# Altium PCB 175-00033, rev1, Crate Slot Power Interface.PcbDoc
Units mil, origin at the board's own origin, x right, y up, seen from the top; angles counter-clockwise.
Board outline 5905.51 x 3937.01 mil, 4 copper layers (Top Layer (*.GTL), Internal Plane 1 (*.GP1), Internal Plane 2 (*.GP2), Bottom Layer (*GBL)); 16 components, 13 nets, 93 pads, 22 vias.
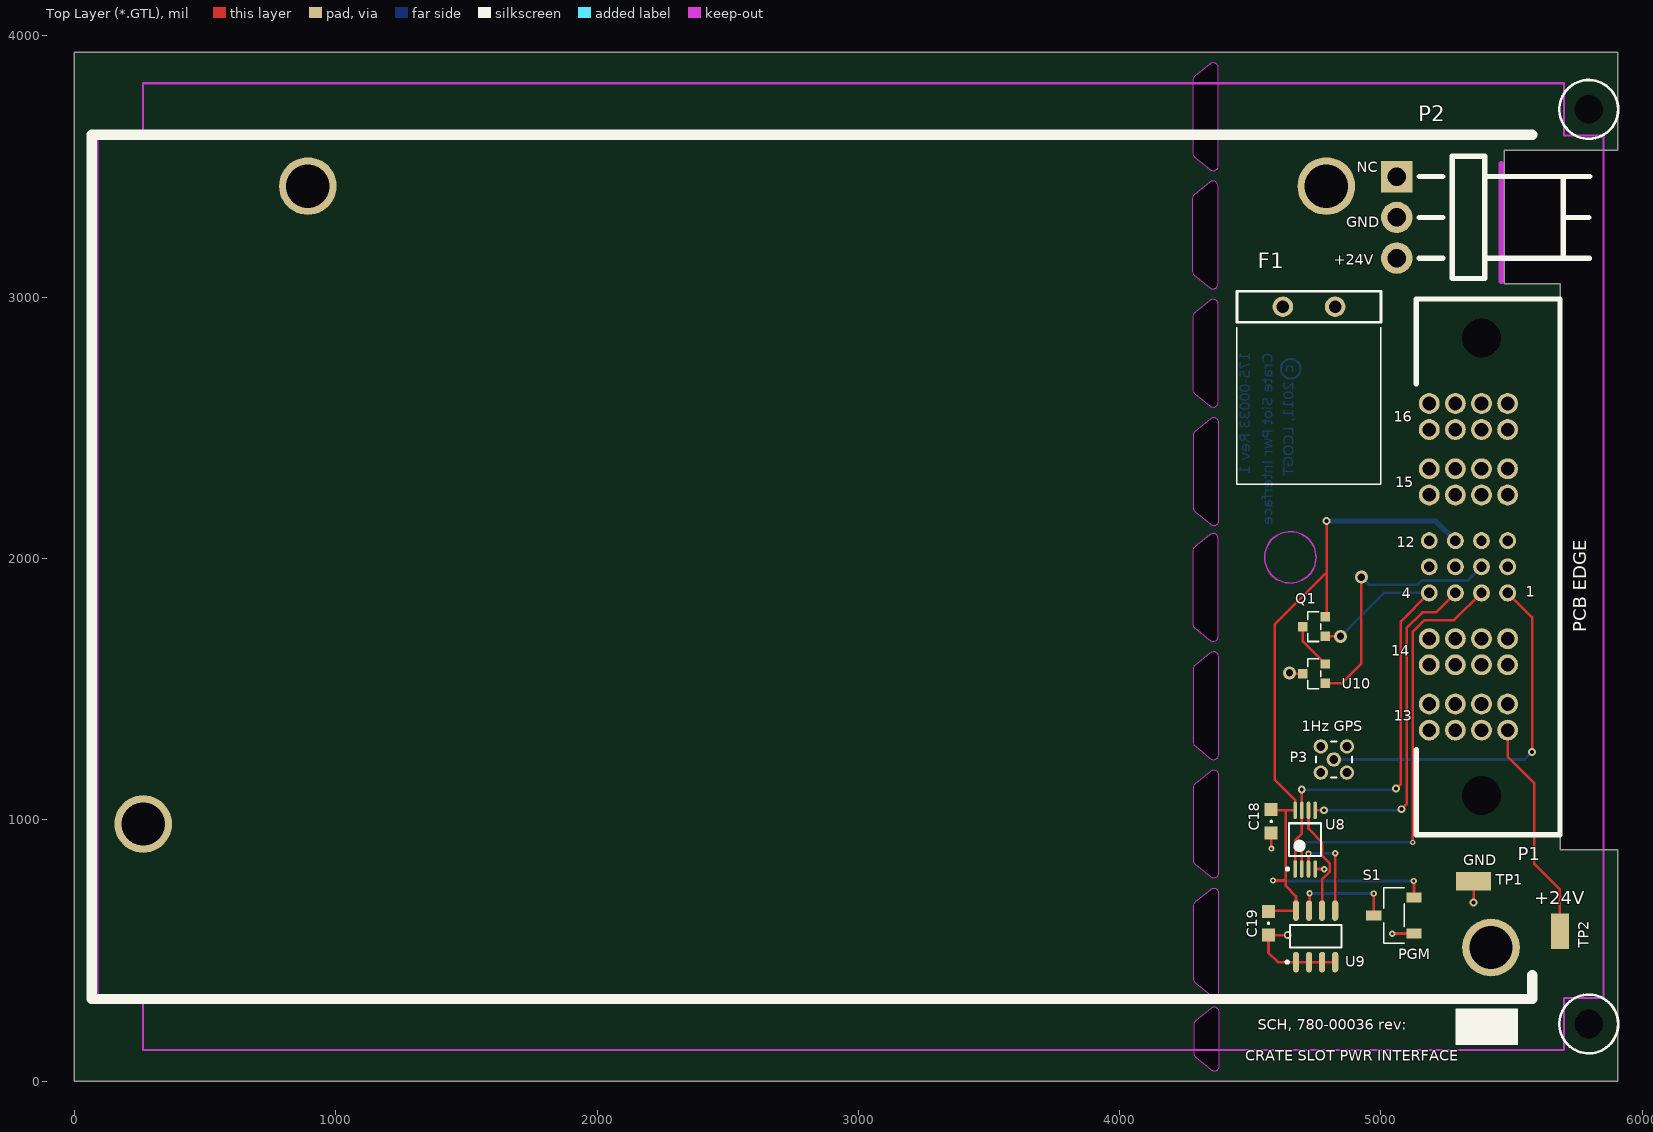
[diagram p0: Top Layer (*.GTL) view]
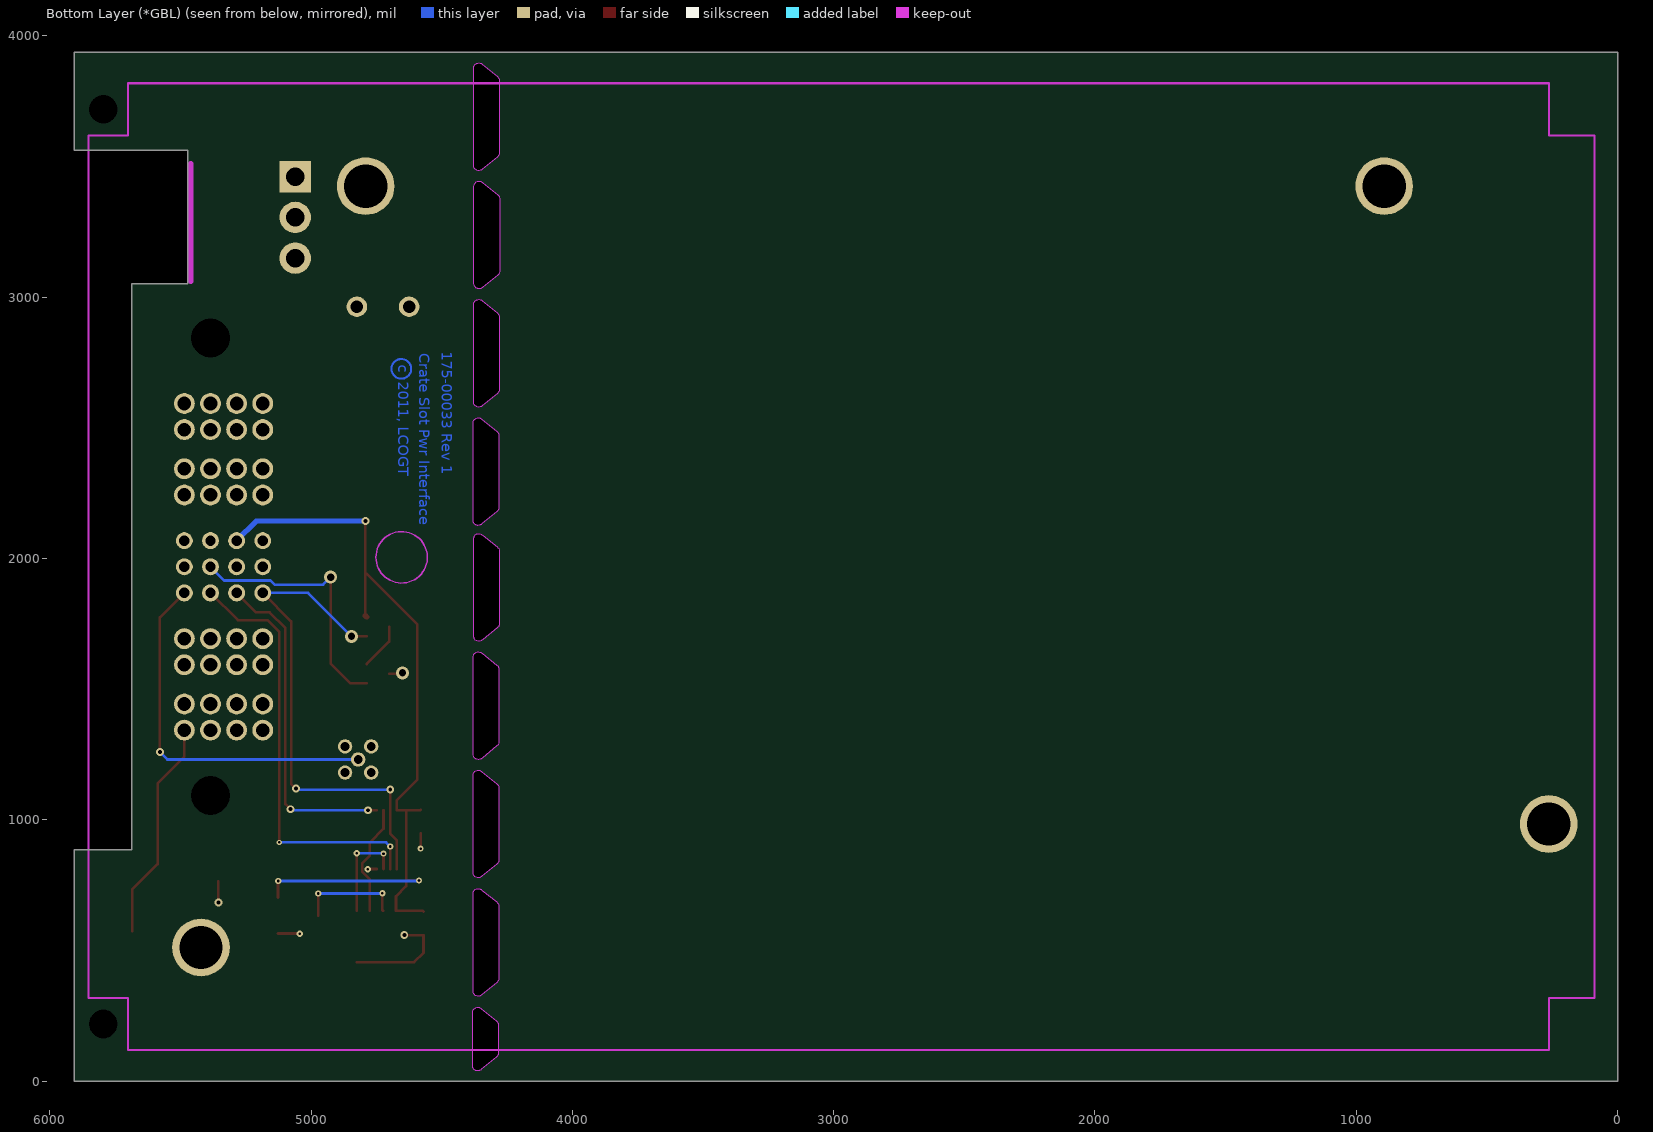
[diagram p1: Bottom Layer (*GBL) view, seen from below]
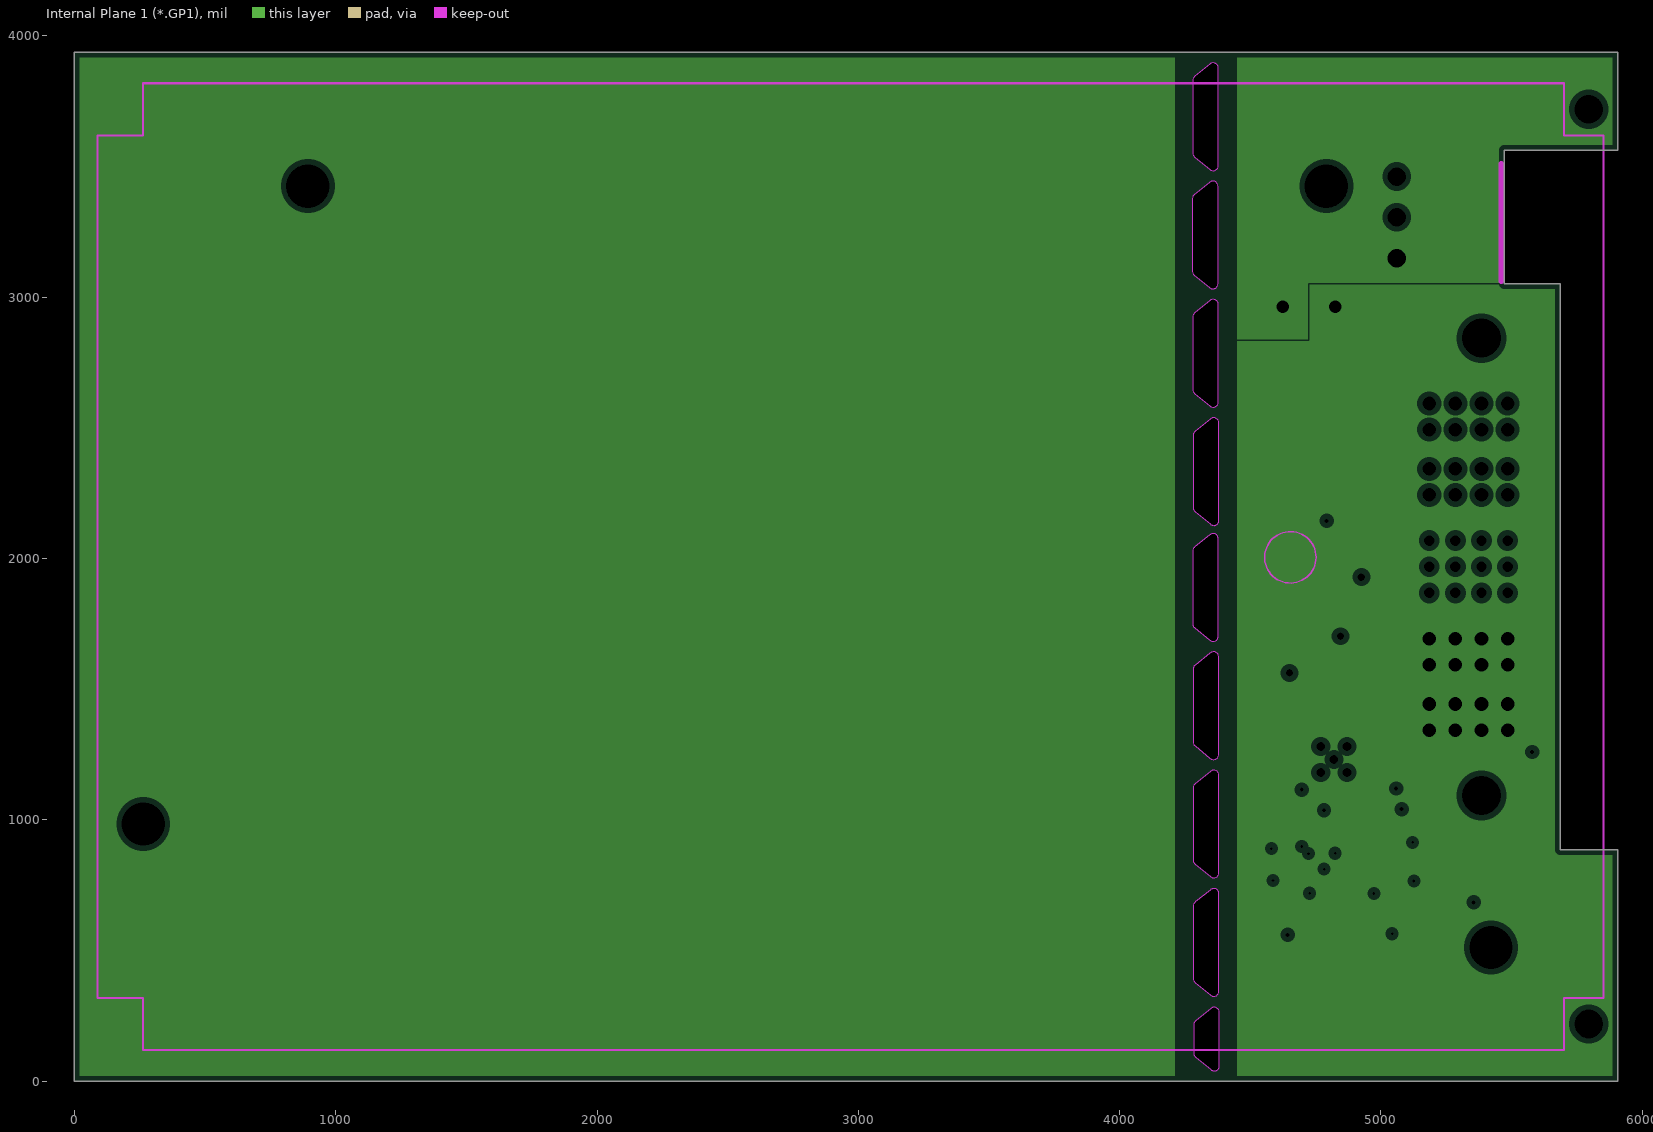
[diagram p2: Internal Plane 1 (*.GP1), clearances drawn from the general rule]
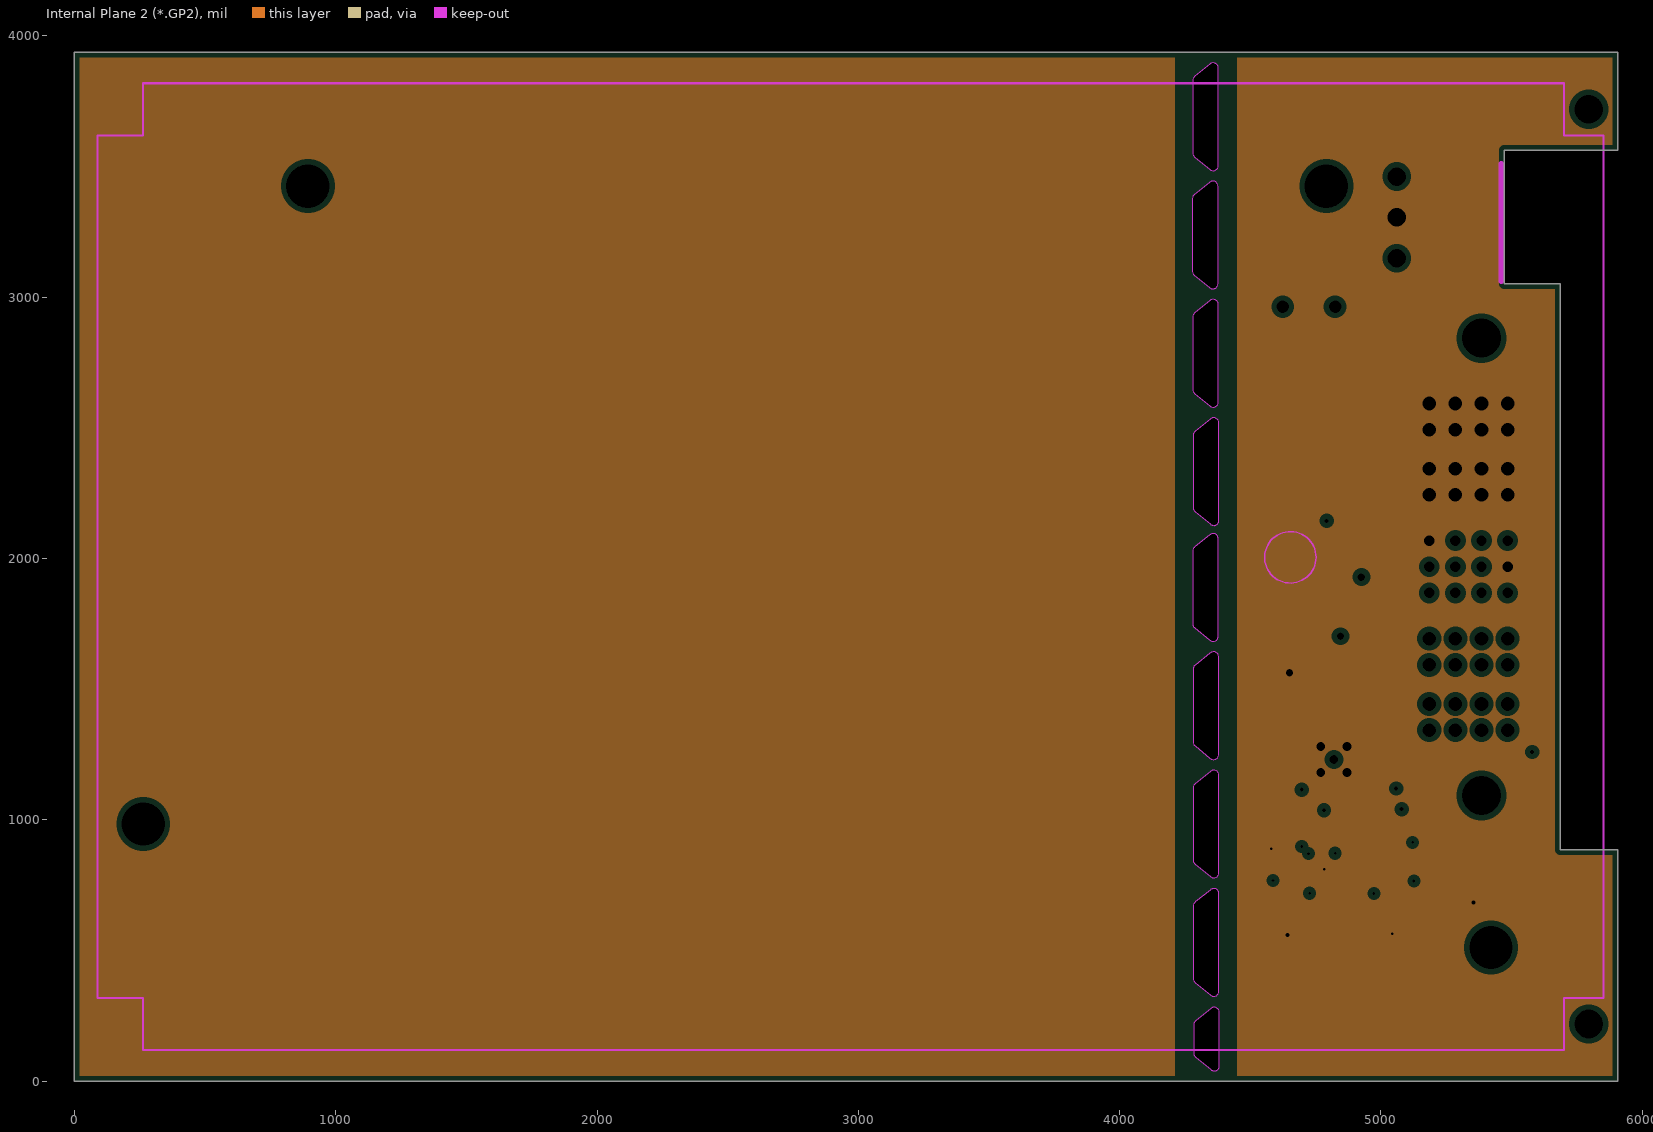
[diagram p3: Internal Plane 2 (*.GP2), clearances drawn from the general rule]

## Layer stack, top to bottom
Top Layer (*.GTL): signal copper 1.4
Dielectric: core 12.6, FR-4, Dk 4.8
Internal Plane 1 (*.GP1): plane copper 1.4, net (Multiple Nets)
Dielectric: prepreg 12.6, FR-4, Dk 4.8
Internal Plane 2 (*.GP2): plane copper 1.4, net GND
Dielectric: core 12.6, FR-4, Dk 4.8
Bottom Layer (*GBL): signal copper 1.4

## Board outline
0,0 0,3937.01 5905.51,3937.01 5905.51,3562.99 5472.44,3562.99 5472.44,3051.18 5685.04,3051.18 5685.04,885.83 5905.51,885.83 5905.51,0
cut-out: 4279.16,3553.17 ccw(c4298.82,3552.18) 4287.11,3536.36 4343.91,3490.08 ccw(c4357.87,3503.95) 4377.56,3503.95 4377.56,3876.99 ccw(c4357.87,3876.99) 4343.91,3890.86 4287.11,3845.34 ccw(c4298.82,3829.51) 4279.16,3828.53 4279.13,3828.53
cut-out: 4278.02,3100.88 ccw(c4297.68,3099.9) 4285.97,3084.08 4342.77,3037.8 ccw(c4356.73,3051.67) 4376.42,3051.67 4376.42,3424.7 ccw(c4356.73,3424.7) 4342.77,3438.58 4285.97,3393.06 ccw(c4297.68,3377.23) 4278.02,3376.25 4277.99,3376.25
cut-out: 4279.16,2648.13 ccw(c4298.82,2647.15) 4287.11,2631.32 4343.91,2585.04 ccw(c4357.87,2598.92) 4377.56,2598.92 4377.56,2971.95 ccw(c4357.87,2971.95) 4343.91,2985.83 4287.11,2940.3 ccw(c4298.82,2924.48) 4279.16,2923.49 4279.13,2923.49
cut-out: 4281.33,2195.37 ccw(c4300.99,2194.39) 4289.28,2178.57 4346.08,2132.28 ccw(c4360.04,2146.16) 4379.73,2146.16 4379.73,2519.19 ccw(c4360.04,2519.19) 4346.08,2533.07 4289.28,2487.54 ccw(c4300.99,2471.72) 4281.33,2470.74 4281.3,2470.74
cut-out: 4278.97,1752.08 ccw(c4298.63,1751.09) 4286.92,1735.27 4343.72,1688.99 ccw(c4357.68,1702.86) 4377.37,1702.86 4377.37,2075.9 ccw(c4357.68,2075.9) 4343.72,2089.77 4286.92,2044.25 ccw(c4298.63,2028.42) 4278.97,2027.44 4278.94,2027.44
cut-out: 4280.76,1299.7 ccw(c4300.42,1298.72) 4288.71,1282.9 4345.51,1236.61 ccw(c4359.47,1250.49) 4379.16,1250.49 4379.16,1623.52 ccw(c4359.47,1623.52) 4345.51,1637.4 4288.71,1591.88 ccw(c4300.42,1576.05) 4280.76,1575.07 4280.73,1575.07
cut-out: 4281.33,846.95 ccw(c4300.99,845.96) 4289.28,830.14 4346.08,783.86 ccw(c4360.04,797.74) 4379.73,797.74 4379.73,1170.77 ccw(c4360.04,1170.77) 4346.08,1184.65 4289.28,1139.12 ccw(c4300.99,1123.3) 4281.33,1122.31 4281.3,1122.31
cut-out: 4281.61,393.81 ccw(c4301.28,392.83) 4289.57,377 4346.37,330.72 ccw(c4360.33,344.6) 4380.02,344.6 4380.02,717.63 ccw(c4360.33,717.63) 4346.37,731.51 4289.57,685.98 ccw(c4301.28,670.16) 4281.61,669.17 4281.59,669.17
cut-out: 4283.28,108.1 ccw(c4302.94,107.11) 4291.23,91.29 4348.03,45.01 ccw(c4361.99,58.89) 4381.68,58.89 4381.68,263.44 ccw(c4361.99,263.44) 4348.03,277.32 4291.23,231.79 ccw(c4302.94,215.97) 4283.28,214.98

## Design rules (kind name [scope] priority, off if disabled: settings)
Clearance [All] p1: gap=5
HoleSize [All] p1: absolutevalues=TRUE maxlimit=500 minlimit=1 maxpercent=80.000 minpercent=20.000
HoleToHoleClearance [All] p1: gap=3 allowstackedmicrovias=TRUE
MinimumSolderMaskSliver [All] p1: minsoldermaskwidth=2
PlaneClearance [All] p1: clearance=20
PlaneConnect [All] p1: planeconnectstyle=Direct reliefexpansion=20 reliefentries=4 reliefconductorwidth=10 reliefairgap=10
PolygonConnect [All] p1: connectstyle=Relief reliefconductorwidth=10 reliefentries=4 polygonreliefangle="90 Angle"
RoomDefinition "780-00036, rev1, Sch, Crate Slot Power Interface" [InComponentClass('780-00036, rev1, Sch, Crate Slot Power Interface')] p1: confinementstyle=ConfineIn formatcopy=TRUE lockcomponents=FALSE outline 4433.69,393.89 5819.69,393.89 5819.69,3559.89 4433.69,3559.89
RoutingVias [All] p1: holewidth=10 width=20 viastyle="Through Hole" minholewidth=10 minwidth=20 maxholewidth=50 maxwidth=50
SilkToSilkClearance [All] p1: silktosilkclearance=2
SilkscreenOverComponentPads [All] p1: minsilkscreentomaskgap=2
SolderMaskExpansion [All] p1: expansion=4
Width [All] p1: maxlimit=100 minlimit=8 preferedwidth=10
21 further rules are at their usual default settings.

## Classes and differential pairs
component class "780-00036, rev1, Sch, Crate Slot Power Interface": +24V C18 C19 F1 P1 P2 P3 Q1 S1 TP1 TP2 U8 U9 U10

## Components (designator, comment, footprint, x,y, rotation, side; value= is the part's Value field where it differs from the comment)
C18 "Cap SMD" SMD_0805 4579.65,994.23 r270 top
C19 "Cap SMD" SMD_0805 4569.65,604.23 r270 top
F1 "RUEF400" "PolySwitch Radial 0.2" 4724.41,2963.71 r180 top
P1 "PETC-02-12-02--01-S-RA-SD" PETC-02-12-02-01-RA 5334.65,1968.5 r0 top locked
P2 "Header 3" "HDR 1X3 0.156\" - RT ANGLE" 5060.32,3461.61 r270 top
P3 "COAX MMCX" MMCX2.54-V5 4819.69,1231.1 r90 top
Q1 "FDV304P" SMD_SOT23_3 4744.09,1739.57 r90 top
S1 "CJS-1200TB" CAS-120B 5049.65,634.23 r90 top
TP1 "Test Point SMD" "SMD_TEST POINT" 5354.33,765.45 r180 top
TP2 "Test Point SMD" "SMD_TEST POINT" 5684.65,574.02 r90 top
U8 "SN74CBT3306PWLE" PW008_N 4709.65,924.23 r90 top
U9 "M24C32RMN1" SOP8_N 4749.65,554.23 r90 top
U10 "DS2411" SMD_SOT23_3 4744.09,1559.57 r90 top
? "Comment" "TARGET MECHANICAL 5" 6296,4300 r0 top
? "Comment" "TARGET MECHANICAL 5" -924,4316 r0 top
? "Comment" "TARGET MECHANICAL 5" -795,-878 r0 top

## Footprints (in the part's own frame and the unit in brackets; to place one, negate y for a bottom-side part, rotate by r counter-clockwise, add the part's x,y. Pads: shape width x height; smd on the part's side, far side on the other; paste and mask are expansions set on the pad)
CAS-120B [mm] "Copal Electronics CAS SMD Slide Switch"
  rect 1x1.5 smd: 1(-1.75,-1.95) 2(0,1.95) 3(1.75,-1.95)
  silkscreen extent -2.69,-1 2.69,1
"HDR 1X3 0.156\" - RT ANGLE" [mil] "Connector; Header; 3 Position, RT Angle"
  rect 120x120 hole 70: 1(0,0)
  round 120 hole 70: 2(156,0) 3(312,0)
  Keep-Out Layer lines w20: 400,400 -50,400
  silkscreen extent -78,85 390,739
MMCX2.54-V5 [mm] "Connector; RF Coaxial, MMCX, Thru-Hole; 5 Position; Vertical"
  round 1.4 hole 0.85: 1(0,0) 2(-1.27,-1.27) 3(1.27,-1.27) 4(1.27,1.27) 5(-1.27,1.27)
  silkscreen extent -1.75,-1.75 1.75,1.75
PETC-02-12-02-01-RA [mil] "Samtec Male Pins, PWR(4), Signal(12), Right Angle"
  round 59.06 hole 150 unplated: 0(50,-875) 0(50,875)
  round 65 hole 40: 1(150,-100) 2(50,-100) 3(-50,-100) 4(-150,-100) 5(150,0) 6(50,0) 7(-50,0) 8(-150,0) 9(150,100) 10(50,100) 11(-50,100) 12(-150,100)
  round 80 hole 52: 13(-150,-625) 13(-150,-525) 13(-50,-625) 13(-50,-525) 13(50,-625) 13(50,-525) 13(150,-625) 13(150,-525) 14(-150,-375) 14(-150,-275) 14(-50,-375) 14(-50,-275) 14(50,-375) 14(50,-275) 14(150,-375) 14(150,-275) 15(-150,275) 15(-150,375) 15(-50,275) 15(-50,375) 15(50,275) 15(50,375) 15(150,275) 15(150,375) 16(-150,525) 16(-150,625) 16(-50,525) 16(-50,625) 16(50,525) 16(50,625) 16(150,525) 16(150,625)
  silkscreen extent -200,-1025 350,1025
"PolySwitch Radial 0.2" [mm] "PolySwitch footprint"
  round 2 hole 1.2: 1(-2.54,0) 2(2.54,0)
  silkscreen extent -7,-1.5 7,1.5
PW008_N [mm] "SOP, 8-Leads, Body 3x4.4mm, Pitch 0.65mm, IPC Medium Density"
  oval 1.7x0.35 smd: 1(-2.85,0.975) 2(-2.85,0.325) 3(-2.85,-0.325) 4(-2.85,-0.975) 5(2.85,-0.975) 6(2.85,-0.325) 7(2.85,0.325) 8(2.85,0.975)
  silkscreen extent -2.97,-1.55 1.6,1.82, body extent -2.25,-1.55 2.25,1.55, height 3.1
SMD_0805 [mil]
  rect 50x50 smd: 1(-45,0) 2(45,0)
  silkscreen extent -1,-1 1,1
SMD_SOT23_3 [mil]
  rect 36x36 smd: 1(-37,-43) 2(37,-43) 3(0,43)
  silkscreen extent -57,-25 57,25
"SMD_TEST POINT" [mil] "Keystone 5015"
  rect 135x70 smd: 1(0,0)
SOP8_N [mm] "SOIC, 8-Leads, Body 4.9x3.9mm, Pitch 1.27mm, IPC Medium Density"
  oval 2x0.6 smd: 1(-2.5,1.905) 2(-2.5,0.635) 3(-2.5,-0.635) 4(-2.5,-1.905) 5(2.5,-1.905) 6(2.5,-0.635) 7(2.5,0.635) 8(2.5,1.905)
  silkscreen extent -2.62,-2.5 1.1,2.88, body extent -2,-2.5 2,2.5, height 1.75
"TARGET MECHANICAL 5" [mil]

## Part data
C18 C19: "Capacitor"
F1: library part "Fuse Thermal", "PolySwitch RUE Series"
P1: "SAMTEC, SIGNAL(12)+PWR(4)"
P2: library part "Header 3, 0.156 RT ANGLE", "Header, 3-Pin, 0.156, RT ANGLE"
P3: library part COAX-M, "RF Coaxial PCB Connector, MMCX; Thru-Hole, Vertical Mount Plug,  50 Ohm Impedance"
Q1: "P-MOSFET LOGIC LEVEL"
S1: library part SW_SPDT_DOUG
TP1 TP2: "SMD loop test point"
U8: "Dual FET Bus Switch"
U9: "32 Kbit Serial I²C Bus EEPROM"
U10: "Silicon Serial Number"

## Free pads (board coordinates)
  round 220.47 hole 166.14: 0(263.39,984.25) 0(893.31,3425.2) 0(4790.94,3425.2) 0(5420.87,511.81)
  round 50 hole 110 unplated: 2(5795.09,219) 2(5795.09,3719)

## Via types
v1: diameter 24, hole 10, Top Layer (*.GTL) to Bottom Layer (*GBL), 10 vias
v2: diameter 30, hole 15, Top Layer (*.GTL) to Bottom Layer (*GBL), 8 vias
v3: diameter 50, hole 28, Top Layer (*.GTL) to Bottom Layer (*GBL), 3 vias
v4: diameter 20, hole 10, Top Layer (*.GTL) to Bottom Layer (*GBL), 1 vias

## Nets (pads, with @x,y where several pads share a name; then routed paths per layer and width w, separated by ;. In a path a pad name is that pad's centre, name@x,y a point inside that pad or via, vN(x,y) a via of type N, cw(c..) or ccw(c..) an arc to the next point about the centre after c; other vN are vias at no path point)
+3.3V_BKPL: C18.1 C19.1 P1.11 Q1.2 S1.3 U8.8 U9.8 | length 3166.9
  Top Layer (*.GTL) w10: C19.1 4573.07,652.65 U9.8 4674.65,707.23 4635.65,746.23 4635.65,768.23 ; C18.1 4582.44,1036.43 4635.65,1036.43 ; v1(4586.65,768.23) 4635.65,768.23 ; Q1.2@4792,1781.47 4792,1941 ; v2(4792,2144) 4792,1941 ; v1(5125.65,766.23) 5126.42,765.45 S1.3 ; 4635.65,768.23 4635.65,1036.43 ; 4635.65,1036.43 U8.8 4671.26,1075.74 4594,1153 4594,1749 4786,1941 4792,1941
  Top Layer (*.GTL) w20: Q1.2 Q1.2@4792,1781.47
  Bottom Layer (*GBL) w10: v1(4586.65,768.23) 4588.65,766.23 v1(5125.65,766.23)
  Bottom Layer (*GBL) w20: v2(4792,2144) 5209.15,2144 P1.11
+24V: F1.1 P1.13 P1.14 TP2.1 | length 852.3
  Top Layer (*.GTL) w10: P1.13@5484.65,1343.5 5484.65,1242.35 5587,1140 5587,831 5684.65,733.35 TP2.1
+24V_FUSED: F1.2 P2.3
GND: C18.2 C19.2 P1.5 P1.12 P1.15 P1.16 P2.2 P3.2 P3.3 P3.4 P3.5 S1.1 TP1.1 U8.4 U9.1 U9.2 U9.3 U9.4 U10.3 | length 723.3
  Top Layer (*.GTL) w10: C18.2 4579.65,891.23 v1(4580.65,890.23) ; v2(4643,560) 4642.23,559.23 C19.2 4569.65,491.23 4605.07,455.8 U9.1 U9.2 U9.3 U9.4 ; v3(4650.09,1562.57) 4653.09,1559.57 U10.3 ; U8.4 4781.85,812.02 v1(4782.65,811.23) ; v1(5042.65,564.23) 5043.75,565.33 S1.1 ; v2(5354.33,684.37) TP1.1
GPS_DATA: P1.1 P3.1 | length 1418
  Top Layer (*.GTL) w10: P1.1 5578.35,1774.8 v2(5578.35,1259.84)
  Bottom Layer (*GBL) w10: P3.1 5549.61,1231.1 v2(5578.35,1259.84)
I2C_SCL: U8.6 U9.6 | length 430.3
  Top Layer (*.GTL) w10: U8.6 4722.44,966.43 4774.65,914.23 4774.65,863.23 4804.65,833.23 4804.65,802.11 4774.65,772.11 U9.6
I2C_SDA: U8.3 U9.5 | length 381.3
  Top Layer (*.GTL) w10: U8.3 v1(4722.44,871.02) ; U9.5 v1(4824.65,872.23)
  Bottom Layer (*GBL) w10: v1(4722.44,871.02) 4723.65,872.23 v1(4824.65,872.23)
NetP1_2: P1.2 U8.2 | length 1647.4
  Top Layer (*.GTL) w10: U8.2 v1(4696.85,898.02) ; v4(5121.09,913.91) 5121.09,1719 5166.09,1764 5280.14,1764 P1.2
  Bottom Layer (*GBL) w10: v1(4696.85,898.02) 4712.74,913.91 v4(5121.09,913.91)
NetP1_3: P1.3 U8.5 | length 1275.2
  Top Layer (*.GTL) w10: U8.5@4748.6,1037 v2(4782,1037) ; v2(5079,1041) 5098.09,1060.09 5098.09,1734 5158.09,1794 5210.14,1794 P1.3
  Bottom Layer (*GBL) w10: v2(4782,1037) 5075,1037 v2(5079,1041)
NetQ1_3: Q1.3 U10.2 | length 178.6
  Top Layer (*.GTL) w10: Q1.3 4701.09,1682.57 U10.2
NetS1_2: S1.2 U9.7 | length 397.9
  Top Layer (*.GTL) w10: U9.7 4726.65,654.65 v1(4726.65,719.23) ; v1(4972.65,718.23) 4972.87,718 S1.2
  Bottom Layer (*GBL) w10: v1(4726.65,719.23) 4727.65,718.23 v1(4972.65,718.23)
SILICON_SN: P1.6 U10.1 | length 999.5
  Top Layer (*.GTL) w10: U10.1 4848.48,1522.57 4925,1599.09 v3(4925,1929)
  Bottom Layer (*GBL) w10: v3(4925,1929) 4954,1900 5139,1900 5155,1916 5332.14,1916 P1.6
~CS_SLOT: P1.4 Q1.1 U8.1 U8.7 | length 1944.6
  Top Layer (*.GTL) w10: U8.1 4671.26,921.84 4696.85,947.43 U8.7 v2(4696.85,1116) ; Q1.1 v3(4845.09,1702.57) ; v2(5058,1120) 5076.09,1138.09 5076.09,1759.95 P1.4
  Bottom Layer (*GBL) w10: v2(4696.85,1116) 5054,1116 v2(5058,1120) ; v3(4845.09,1702.57) 5011.03,1868.5 P1.4
pads on no net: P1.0 P1.7 P1.8 P1.9 P1.10 P2.1
copper on no net: | length 236.5
  Bottom Layer (*GBL) w8: 4692,2726 ccw(c4654.36,2726) 4692,2726

## Polygon pours and split planes (outlines as drawn)
+24V_FUSED on Internal Plane 1 (*.GP1) (split plane): 5885.41,3583.09 5472.44,3583.09 5468.52,3582.7 5464.75,3581.56 5461.28,3579.7 5458.23,3577.2 5455.73,3574.16 5453.87,3570.68 5452.73,3566.91 5452.34,3562.99 5452.34,3053.73 4724.41,3053.73 4723.43,3053.54 4722.61,3052.98 4722.05,3052.16 4721.86,3051.18 4721.86,2837.19 4448.82,2837.19 4448.82,3916.91 5885.41,3916.91
+24V on Internal Plane 1 (*.GP1) (split plane): 5452.73,3047.26 5453.87,3043.49 5455.73,3040.02 5458.23,3036.97 5461.28,3034.47 5464.75,3032.61 5468.52,3031.47 5472.44,3031.08 5664.94,3031.08 5664.94,885.83 5665.33,881.91 5666.47,878.14 5668.33,874.66 5670.83,871.62 5673.87,869.12 5677.35,867.26 5681.12,866.12 5685.04,865.73 5885.41,865.73 5885.41,20.1 4448.82,20.1 4448.82,2829.55 4449.79,2829.74 4450.62,2830.29 4451.17,2831.12 4451.37,2832.1 4724.41,2832.1 4725.38,2832.29 4726.21,2832.84 4726.76,2833.67 4726.96,2834.65 4726.96,3048.63 5452.6,3048.63
+24V on Internal Plane 1 (*.GP1) (split plane): 4212.6,20.1 20.1,20.1 20.1,3916.91 4212.6,3916.91
GND on Internal Plane 2 (*.GP2) (split plane): 5885.41,3583.09 5472.44,3583.09 5468.52,3582.7 5464.75,3581.56 5461.28,3579.7 5458.23,3577.2 5455.73,3574.16 5453.87,3570.68 5452.73,3566.91 5452.34,3562.99 5452.34,3051.18 5452.73,3047.26 5453.87,3043.49 5455.73,3040.02 5458.23,3036.97 5461.28,3034.47 5464.75,3032.61 5468.52,3031.47 5472.44,3031.08 5664.94,3031.08 5664.94,885.83 5665.33,881.91 5666.47,878.14 5668.33,874.66 5670.83,871.62 5673.87,869.12 5677.35,867.26 5681.12,866.12 5685.04,865.73 5885.41,865.73 5885.41,20.1 4448.82,20.1 4448.82,3916.91 5885.41,3916.91
GND on Internal Plane 2 (*.GP2) (split plane): 4212.6,20.1 20.1,20.1 20.1,3916.91 4212.6,3916.91

## Keep-outs
Keep-Out Layer:
  circle w5: c4653.14,2004.68 r98.44
  lines w8: 88.39,319 88.39,3619 263.39,3619 263.39,3819 5700.69,3819 5700.69,3619 5850.69,3619 5850.69,319 5700.69,319 5700.69,119 263.39,119 263.39,319 88.39,319

## Other copper
Top Layer (*.GTL):
  text "*.GTL - TOP LAYER GERBER DATA" at 1644,-1316 h80
Bottom Layer (*GBL):
  text "175-00033 Rev 1" at 4499,2791 h40 r90
  text "Crate Slot Pwr Interface" at 4585,2786 h40 r90
  text "c  2011, LCOGT" at 4667,2741 h40 r90
  text "*.GBL - BOTTOM LAYER GERBER DATA" at 1644,-1316 h80
Internal Plane 1 (*.GP1) (plane layer: these items are gaps in the copper):
  pour cut-out: 4212.6,3937.01 4212.6,0 4448.82,0 4448.82,3937.01
  lines w5: 4330.71,2832.1 4448.82,2832.1 ; 4448.82,2834.65 4724.41,2834.65 4724.41,3051.18 5472.44,3051.18
  text "*.GP1 - INTERNAL PLANE LAYER 1 GERBER DATA" at 1644,-1316 h80
Internal Plane 2 (*.GP2) (plane layer: these items are gaps in the copper):
  pour cut-out: 4212.6,3937.01 4212.6,0 4448.82,0 4448.82,3937.01
  text "*.GP2 - INTERNAL PLANE LAYER 2 GERBER DATA" at 1644,-1316 h80

## Silkscreen, mask and mechanical layers (free items; w line width, h text height)
Top Overlay:
  circle w10: c5795.09,219 r112.5
  circle w10: c5795.09,3719 r112.5
  rectangle: 5284.65,138.26 5523.46,277.63
  lines w5: 4448.82,2884.29 4448.82,2283.46 5000,2283.46 5000,2884.29
  lines w39.37: 5578.35,406.59 5578.35,314.96 66.54,314.96 66.54,3622.05 5164.29,3622.05 5578.35,3622.05
  text "NC" at 4908,3478 h40
  text "GND" at 4867,3268 h40
  text "+24V" at 4819,3124 h40
  text "1Hz GPS" at 4697.09,1338.58 h40
  text "GND" at 5314.96,826.77 h40
  text "+24V" at 5587,677.53 h50
  text "PGM" at 5065.55,467.14 h40
  text "SCH, 780-00036 rev:" at 4527.56,196.85 h40
  text "CRATE SLOT PWR INTERFACE" at 4479.66,78.74 h40
  text "*.GTO - TOP OVERLAY GERBER DATA" at 1644,-1316 h80
Top Paste:
  text "*.GTP - TOP-SIDE SOLDER PASTE MASK" at 1643.99,-1315.99 h80
Top Solder:
  text "*.GTS - TOP SOLDER MASK GERBER DATA" at 1644,-1316 h80
Bottom Solder:
  rectangle: 4431,1817 4706,2845
  text "*.GBS - BOTTOM SOLDER MASK GERBER DATA" at 1644,-1316 h80
Mechanical 1:
  the board outline again, w39.37
Mechanical 2:
  lines w10: -10224,-9889 -10224,6111 10776,6111 10776,-9889 -10224,-9889 ; 6721,-9783 ccw(c6771,-9783) 6771,-9833 7101,-9833 ccw(c7101,-9793) 7141,-9793 7141,-9623 ccw(c7101,-9623) 7101,-9583 6721,-9583 6721,-9783 ; 6721,-9493 ccw(c6771,-9493) 6771,-9543 10671,-9543 ccw(c10671,-9493) 10721,-9493 10721,-9303 ccw(c10671,-9303) 10671,-9253 6721,-9253 6721,-9493 ; 6721,-9163 ccw(c6771,-9163) 6771,-9213 8651,-9213 ccw(c8651,-9163) 8701,-9163 8701,-9013 ccw(c8651,-9013) 8651,-8963 6721,-8963 6721,-9163 ; 6721,-8883 ccw(c6761,-8883) 6761,-8923 7571,-8923 ccw(c7571,-8873) 7621,-8873 7621,-8723 ccw(c7571,-8723) 7571,-8673 6721,-8673 6721,-8883 ; 7181,-9793 ccw(c7221,-9793) 7221,-9833 9181,-9833 ccw(c9181,-9793) 9221,-9793 9221,-9623 ccw(c9181,-9623) 9181,-9583 7181,-9583 7181,-9793 ; 7661,-8873 ccw(c7711,-8873) 7711,-8923 8651,-8923 ccw(c8651,-8873) 8701,-8873 8701,-8723 ccw(c8651,-8723) 8651,-8673 7661,-8673 7661,-8873 ; 8741,-9163 ccw(c8791,-9163) 8791,-9213 10671,-9213 ccw(c10671,-9163) 10721,-9163 10721,-9013 ccw(c10671,-9013) 10671,-8963 8741,-8963 8741,-9163 ; 8741,-8873 ccw(c8791,-8873) 8791,-8923 9731,-8923 ccw(c9731,-8873) 9781,-8873 9781,-8723 ccw(c9731,-8723) 9731,-8673 8741,-8673 8741,-8873 ; 9261,-9783 ccw(c9311,-9783) 9311,-9833 9641,-9833 ccw(c9641,-9793) 9681,-9793 9681,-9623 ccw(c9641,-9623) 9641,-9583 9261,-9583 9261,-9783 ; 9721,-9793 ccw(c9761,-9793) 9761,-9833 10671,-9833 ccw(c10671,-9783) 10721,-9783 10721,-9633 ccw(c10671,-9633) 10671,-9583 9721,-9583 9721,-9793 ; 9821,-8873 ccw(c9871,-8873) 9871,-8923 10671,-8923 ccw(c10671,-8873) 10721,-8873 10721,-8723 ccw(c10671,-8723) 10671,-8673 9821,-8673 9821,-8873
  lines w14: -8840,-5824.33 -4184,-5824.33 ; -8840,-5564.33 -4184,-5564.33 ; -8900,-7934 ccw(c-8816,-7934) -8816,-8018 -4208,-8018 ccw(c-4208,-7934) -4124,-7934 -4124,-4822 ccw(c-4208,-4822) -4208,-4738 -8816,-4738 ccw(c-8816,-4822) -8900,-4822 -8900,-7934
  lines w20: -10203.94,-9243.12 cw(c-10154,-9318) -10154,-9228 ; -10154,-9268 ccw(c-10154,-9318) -10204,-9318 -10204,-9808 ccw(c-10154,-9808) -10154,-9858 -6954,-9858 ccw(c-6954,-9808) -6904,-9808 -6904,-9468 ccw(c-6954,-9468) -6954,-9418 -9594,-9418 ; -6879.12,-9857.94 ccw(c-6954,-9808) -6864,-9808 -6864,-9468 ; 6677.17,-9872.98 cw(c6771,-9783) 6641,-9783 6641,-8113 cw(c6771,-8113) 6771,-7983 10671,-7983 cw(c10671,-8113) 10759.66,-8017.92 ; -2694,-9709 ccw(c-2564,-9709) -2564,-9839 2176,-9839 ccw(c2176,-9709) 2306,-9709 2306,-8119 ccw(c2176,-8119) 2176,-7989 -2564,-7989 ccw(c-2564,-8119) -2694,-8119 -2694,-9709 ; 6681,-9783 ccw(c6771,-9783) 6771,-9873 10671,-9873 ccw(c10671,-9783) 10761,-9783 10761,-8113 ccw(c10671,-8113) 10671,-8023 6771,-8023 ccw(c6771,-8113) 6681,-8113 6681,-9783
  lines w24: -144,-9679 6,-9679 ; -144,-9429 6,-9429 ; -144,-9179 6,-9179 ; -144,-8929 6,-8929 ; -144,-8679 6,-8679
  lines w30: -10724,-10389 -10724,6611 11276,6611 11276,-10389 -10724,-10389
  lines w50: 6866,-8524 8516,-8524 ; 6866,-8144 8516,-8144 ; 8516,-8524 8516,-8144 ; 8516,-8524 6856,-8524 6856,-8144 8516,-8144
  text "NOTES (UNLESS OTHERWISE SPECIFIED):" at -9904,5587 h90
  text "GENERAL" at -9804,5387 h90
  text "1)" at -9704,5186.95 h75
  text "PCB IS 4-LAYER, .062\" THICK." at -9504,5186.97 h75
  text "2)" at -9704,5036.95 h75
  text "CONSTRUCTION IS SOLDER-MASK-OVER-BARE-COPPER (SMOBC)." at -9504,5036.95 h75
  text "3)" at -9704,4886.95 h75
  text "ACCEPTABILITY SHALL BE BASED ON IPC-A-600, CLASS 2." at -9504,4886.95 h75
  text "4)" at -9704,4736.95 h75
  text "THE FOLLOWING GERBER RS274X PHOTO TOOL FILES SHALL BE USED TO DEFINE ALL CIRCUIT FEATURES:" at -9504,4736.95 h75
  text "*.GTL - TOP LAYER GERBER DATA" at -9230,4526 h80
  text "*.GP1 - INTERNAL PLANE LAYER 1 GERBER DATA" at -9230,3911.34 h80
  text "*.GP2 - INTERNAL PLANE LAYER 2 GERBER DATA" at -9230,3757.67 h80
  text "*.GBL - BOTTOM LAYER GERBER DATA" at -9230,3143 h80
  text "*.GTO - TOP OVERLAY GERBER DATA" at -9230,2989.34 h80
  text "*.GTS - TOP SOLDER MASK GERBER DATA" at -9230,2835.67 h80
  text "*.GTP - TOP-SIDE SOLDER PASTE MASK" at -9230.01,2682 h80
  text "*.GBS - BOTTOM SOLDER MASK GERBER DATA" at -9230,2374.67 h80
  text "5)" at -9801,1505.23 h75
  text "THE PHOTO TOOL SHALL NOT BE COMPENSATED WITHOUT PRIOR ENGINEERING APPROVAL." at -9601,1505.23 h75
  text "PCB DESIGNER: RICH LOBDILL   PH (805) 880-1621  FAX (805) 961-1792." at -9601,1355.28 h75
  text "FABRICATION TOLERANCES" at -9746,1029 h90
  text "6)" at -9646,828.95 h75
  text "END PRODUCT CONDUCTOR WIDTHS AND PAD DIAMETERS SHALL NOT VARY MORE THAN" at -9446,828.95 h75
  text "0.002\" FROM THE 1:1 DIMENSIONS OF THE MASTER ARTWORK." at -9446,679 h75
  text "7)" at -9646,528.95 h75
  text "THE CONDUCTIVE PATTERN SHALL BE POSITIONED SO THAT THE LOCATION OF ANY PAD OR" at -9446,528.95 h75
  text "LAND SHALL BE WITHIN 0.005\" DIAMETER TO THE TRUE POSITION OF THE HOLE IT CIRCUMSCRIBES." at -9446,379 h75
  text "8)" at -9646,228.95 h75
  text "ALL DRILL HOLE SIZES AND TOLERANCES APPLY AFTER PLATING." at -9446,228.95 h75
  text "9)" at -9646,78.95 h75
  text "THE MINIMUM ANNULAR RING SHALL BE 0.005\"." at -9446,78.95 h75
  text "10)" at -9701,-71.05 h75
  text "BOW AND TWIST SHALL NOT EXCEED 0.010\" PER INCH." at -9446,-71.05 h75
  text "11)" at -9691,-221.05 h75
  text "FOR PCB ROUTING DIMENSIONS: .XXX = +/-.005\"  .XX = +/-.020\"" at -9446,-221.05 h75
  text "MATERIAL" at -9746,-421 h90
  text "12)" at -9701,-621.05 h75
  text "BASE MATERIAL IS FR4 EPOXY FIBERGLASS" at -9439,-627 h75
  text "SEE STACK-UP LEGEND FOR COPPER CLADDING CALL OUTS" at -9439,-767 h75
  text "13)" at -9701,-771.05 h75
  text "PLATING" at -9746,-971 h90
  text "14)" at -9701,-1166.05 h75
  text "ALL HOLES AND CONDUCTIVE SURFACES SHALL BE PLATED WITH A MINIMUM OF 0.001\" COPPER." at -9446,-1166.05 h75
  text "15)" at -9701,-1316.05 h75
  text "AFTER SOLDERMASK, ALL EXPOSED HOLES AND CONDUCTIVE SURFACES SHALL BE COATED" at -9446,-1316.05 h75
  text "WITH A GOLD IMMERSION PLATING TO PRESERVE SOLDERABILITY." at -9439,-1467 h75
  text "COATINGS" at -9746,-1666 h90
  text "16)" at -9696,-1861.05 h75
  text "THE SOLDERMASK SHALL BE BLACK LIQUID PHOTO-IMAGEABLE PER IPC-SM-840, TYPE-B, CLASS 2." at -9446,-1861.05 h75
  text "17)" at -9701,-2011.05 h75
  text "THE SOLDERMASK REGISTRATION ALLOWANCE IS 0.003\".  THERE SHALL BE NO SOLDERMASK ON" at -9446,-2011.05 h75
  text "ANY SOLDER PAD OR LAND." at -9446,-2161.05 h75
  text "MARKING" at -9746,-2361 h90
  text "18)" at -9701,-2556.05 h75
  text "THE LEGEND SHALL BE SCREEN-PRINTED USING PERMANENT YELLOW EPOXY INK." at -9446,-2556.05 h75
  text "19)" at -9701,-2706.05 h75
  text "THE SCREEN PRINTING REGISTRATION ALLOWANCE IS 0.007\".  THERE SHALL BE NO INK ON ANY" at -9446,-2706.05 h75
  text "SOLDER PAD OR LAND." at -9446,-2856 h75
  text "20)" at -9711,-3006.05 h75
  text "THE VENDOR CODE AND UL FLAMMABILITY RATING MAY BE ETCHED IN THE FOIL OR MARKED IN" at -9446,-3006.05 h75
  text "PERMANENT EPOXY INK (VENDOR'S OPTION)." at -9446,-3156 h75
  text "ELECTRICAL TESTING" at -9746,-3356 h90
  text "21)" at -9701,-3551.05 h75
  text "ALL BOARDS SHALL BE ELECTRICALLY TESTED TO THE SUPPLIED IPC-D-356A NET LIST" at -9446,-3551.05 h75
  text "FOR CONTINUITY, OPENS AND SHORTS." at -9446,-3701 h75
  text "Layer Stack Up Detail for: 175-00033, rev1, Crate Slot Power Interface.PcbDoc" at -8840,-5192.17 h60
  text "Layer" at -8840,-5661.33 h60
  text "COPPER THICKNESS" at -6577,-5751 h100
  text "Name" at -8840,-5781.33 h60
  text "Top Layer (*.GTL)" at -8840,-6079.67 h84
  text "1/2 oz,  1 oz Finished" at -6504,-6097 h100
  text "2 oz" at -6456,-6563 h100
  text "Internal Plane 1 (*.GP1)" at -8840,-6576.33 h84
  text "2 oz" at -6472,-7037 h100
  text "Internal Plane 2 (*.GP2)" at -8840,-7073 h84
  text "1/2 oz,  1 oz Finished" at -6488,-7512 h100
  text "Bottom Layer (*GBL)" at -8840,-7569.67 h84
  text "Las Cumbres Observatory, Inc." at 8686,-8164 h90
  text "Las Cumbres Observatory" at 6916,-8284 h150
  text "PRIMARY PCB SPECIFICATIONS" at -2247,-8299 h200
  text "6740 Cortona Dr." at 9126,-8318 h90
  text "Global Telescope Network" at 7076,-8444 h125
  text "Goleta, CA 93117" at 9076,-8468 h90
  text "(REFER TO COMPLETE SPEC LISTING AT LEFT FOR FURTHER DETAILS)" at -2594,-8504 h100
  text "www.lcogt.net" at 9216,-8614 h90
  text "DATE" at 6741,-8724.8 h32
  text "DESIGNED" at 7681,-8724.8 h32
  text "DRAWN" at 8761,-8724.8 h32
  text "SCALE" at 9841,-8724.8 h32
  text "NUMBER OF LAYERS" at -2494,-8754 h150
  text "4" at 1056,-8754.02 h150
  text "Rich Lobdill" at 9066,-8824 h55
  text "Rich Lobdill" at 7941,-8829 h55
  text "1 : 1" at 10126,-8843 h90
  text "9/1/2011" at 6771,-8850 h90
  text "FINISHED THICKNESS" at -2494,-9004 h150
  text ".062\"" at 881,-9004 h150
  text "CHECKED/DATE" at 6741,-9014.8 h32
  text "APPROVED/DATE" at 8761,-9014.8 h32
  text "BASE MATERIAL" at -2494,-9254 h150
  text "FR4" at 806,-9254 h150
  text "TITLE" at 6741,-9304.8 h32
  text "175-00033, Crate Slot Power Interface" at 6961,-9449 h100
  text "GOLD IMMERSION" at 312,-9471 h150
  text "PLATING TYPE" at -2494,-9504 h150
  text "THIS DRAWING EMBODIES A PROPRIETARY DESIGN OWNED BY LAS CUMBRES" at -10114,-9528 h60
  text "OBSERVATORY.  IT IS SUBMITTED FOR A SPECIFIC PURPOSE UNDER A CON-" at -10114,-9628 h60
  text "SIZE" at 6741,-9634.8 h32
  text "DOC NO." at 7201,-9634.8 h32
  text "REV" at 9281,-9634.8 h32
  text "SHEET" at 9741,-9634.8 h32
  text "FIDENTIAL RELATIONSHIP, AND EXCEPT FOR PURPOSES EXPRESSLY GRANTED" at -10114,-9723 h60
  text "OF" at 10171,-9738 h60
  text "SOLDER MASK COLOR" at -2494,-9754 h150
  text "BLACK" at 931,-9754 h150
  text "1" at 10001,-9758 h100
  text "X" at 10401,-9758 h100
  text "1" at 9426,-9771 h130
  text "-" at 7756,-9773 h130
  text "GPT" at 8475.72,-9787.8 h130
  text "C" at 6876,-9789 h100
  text "IN WRITING, ALL RIGHTS ARE RESERVED BY LAS CUMBRES OBSERVATORY." at -10114,-9813 h60
Mechanical 3:
  lines w5: 4330.71,0 5905.51,0
Mechanical 5:
  text "175-00033, Rev 1, Crate Slot Power Interface" at 1665.03,-885.42 h80
  text "LAS CUMBRES OBSERVATORY     9/1/2011" at 1665.03,-1035.43 h80
Drill Drawing:
  lines w10: -10224,-9889 -10224,6111 10776,6111 10776,-9889 -10224,-9889 ; 6721,-9783 ccw(c6771,-9783) 6771,-9833 7101,-9833 ccw(c7101,-9793) 7141,-9793 7141,-9623 ccw(c7101,-9623) 7101,-9583 6721,-9583 6721,-9783 ; 6721,-9493 ccw(c6771,-9493) 6771,-9543 10671,-9543 ccw(c10671,-9493) 10721,-9493 10721,-9303 ccw(c10671,-9303) 10671,-9253 6721,-9253 6721,-9493 ; 6721,-9173 ccw(c6761,-9173) 6761,-9213 8181,-9213 ccw(c8181,-9163) 8231,-9163 8231,-9013 ccw(c8181,-9013) 8181,-8963 6721,-8963 6721,-9173 ; 7181,-9793 ccw(c7221,-9793) 7221,-9833 9181,-9833 ccw(c9181,-9793) 9221,-9793 9221,-9623 ccw(c9181,-9623) 9181,-9583 7181,-9583 7181,-9793 ; 8271,-9163 ccw(c8321,-9163) 8321,-9213 9731,-9213 ccw(c9731,-9163) 9781,-9163 9781,-9013 ccw(c9731,-9013) 9731,-8963 8271,-8963 8271,-9163 ; 9261,-9783 ccw(c9311,-9783) 9311,-9833 9641,-9833 ccw(c9641,-9793) 9681,-9793 9681,-9623 ccw(c9641,-9623) 9641,-9583 9261,-9583 9261,-9783 ; 9721,-9793 ccw(c9761,-9793) 9761,-9833 10671,-9833 ccw(c10671,-9783) 10721,-9783 10721,-9633 ccw(c10671,-9633) 10671,-9583 9721,-9583 9721,-9793 ; 9821,-9163 ccw(c9871,-9163) 9871,-9213 10671,-9213 ccw(c10671,-9163) 10721,-9163 10721,-9013 ccw(c10671,-9013) 10671,-8963 9821,-8963 9821,-9163
  lines w20: -10198.94,-9258.12 cw(c-10149,-9333) -10149,-9243 ; -10149,-9283 ccw(c-10149,-9333) -10199,-9333 -10199,-9823 ccw(c-10149,-9823) -10149,-9873 -6949,-9873 ccw(c-6949,-9823) -6899,-9823 -6899,-9483 ccw(c-6949,-9483) -6949,-9433 -9589,-9433 ; -6874.12,-9872.94 ccw(c-6949,-9823) -6859,-9823 -6859,-9483 ; 6675.92,-9871.66 cw(c6771,-9783) 6641,-9783 6641,-8963 cw(c6721,-8963) 6721,-8883 10671,-8883 cw(c10671,-9013) 10759.66,-8917.92 ; 6681,-9783 ccw(c6771,-9783) 6771,-9873 10671,-9873 ccw(c10671,-9783) 10761,-9783 10761,-9013 ccw(c10671,-9013) 10671,-8923 6721,-8923 ccw(c6721,-8963) 6681,-8963 6681,-9783
  lines w30: -10724,-10389 -10724,6611 11276,6611 11276,-10389 -10724,-10389
  text ".Legend" at 250,-5772 h100
  text "DESIGNED" at 6741,-9014.8 h32
  text "DRAWN" at 8291,-9014.8 h32
  text "SCALE" at 9841,-9014.8 h32
  text "Rich Lobdill" at 7227,-9111 h55
  text "Rich Lobdill" at 8788,-9113 h55
  text "1 : 1" at 10126,-9133 h90
  text "TITLE" at 6741,-9304.8 h32
  text "175-00033, Crate Slot Power Interface" at 6958,-9449 h100
  text "THIS DRAWING EMBODIES A PROPRIETARY DESIGN OWNED BY LAS CUMBRES" at -10109,-9543 h60
  text "SIZE" at 6741,-9634.8 h32
  text "DOC NO." at 7201,-9634.8 h32
  text "REV" at 9281,-9634.8 h32
  text "SHEET" at 9741,-9634.8 h32
  text "OBSERVATORY.  IT IS SUBMITTED FOR A SPECIFIC PURPOSE UNDER A CON-" at -10109,-9643 h60
  text "FIDENTIAL RELATIONSHIP, AND EXCEPT FOR PURPOSES EXPRESSLY GRANTED" at -10109,-9738 h60
  text "OF" at 10171,-9738 h60
  text "2" at 9986,-9758 h100
  text "X" at 10401,-9758 h100
  text "-" at 7756,-9773 h130
  text "1" at 9421,-9773 h130
  text "C" at 6876,-9789 h120
  text "GD1" at 8576,-9789 h120
  text "IN WRITING, ALL RIGHTS ARE RESERVED BY LAS CUMBRES OBSERVATORY." at -10109,-9828 h60

## Dimensions
0,0 to 0,3937.01 on Mechanical 2
0,0 to 5905.51,0 on Mechanical 2
4258,3998 to 3772,4662 on Mechanical 2

## Text inside footprints (layer, text, board x,y; h text height)
P1: Top Overlay "15" at 5054.65,2273.5 h40; Top Overlay "14" at 5039.65,1628.5 h40; Top Overlay "12" at 5059.65,2043.5 h40; Top Overlay "4" at 5079.65,1848.5 h40; Top Overlay "16" at 5049.65,2523.5 h40; Top Overlay "13" at 5049.65,1378.5 h40; Top Overlay "PCB EDGE" at 5784.65,1718.5 h50 r90; Top Overlay "1" at 5554.65,1853.5 h40